# EAGLE board edu (EAGLE 7.6.0)
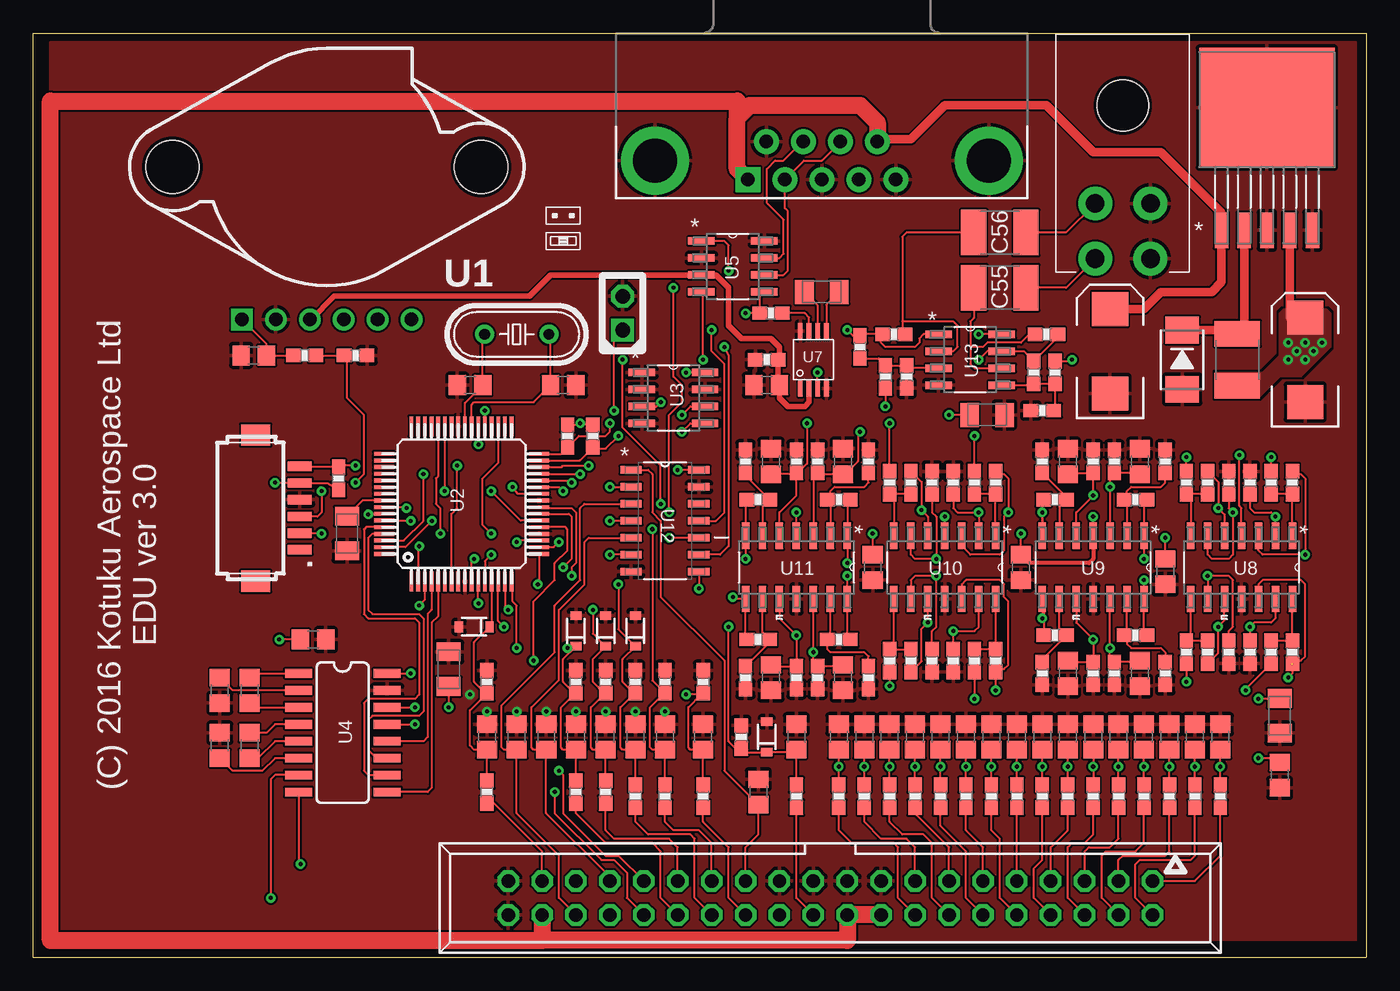
[diagram p0: board, top side]
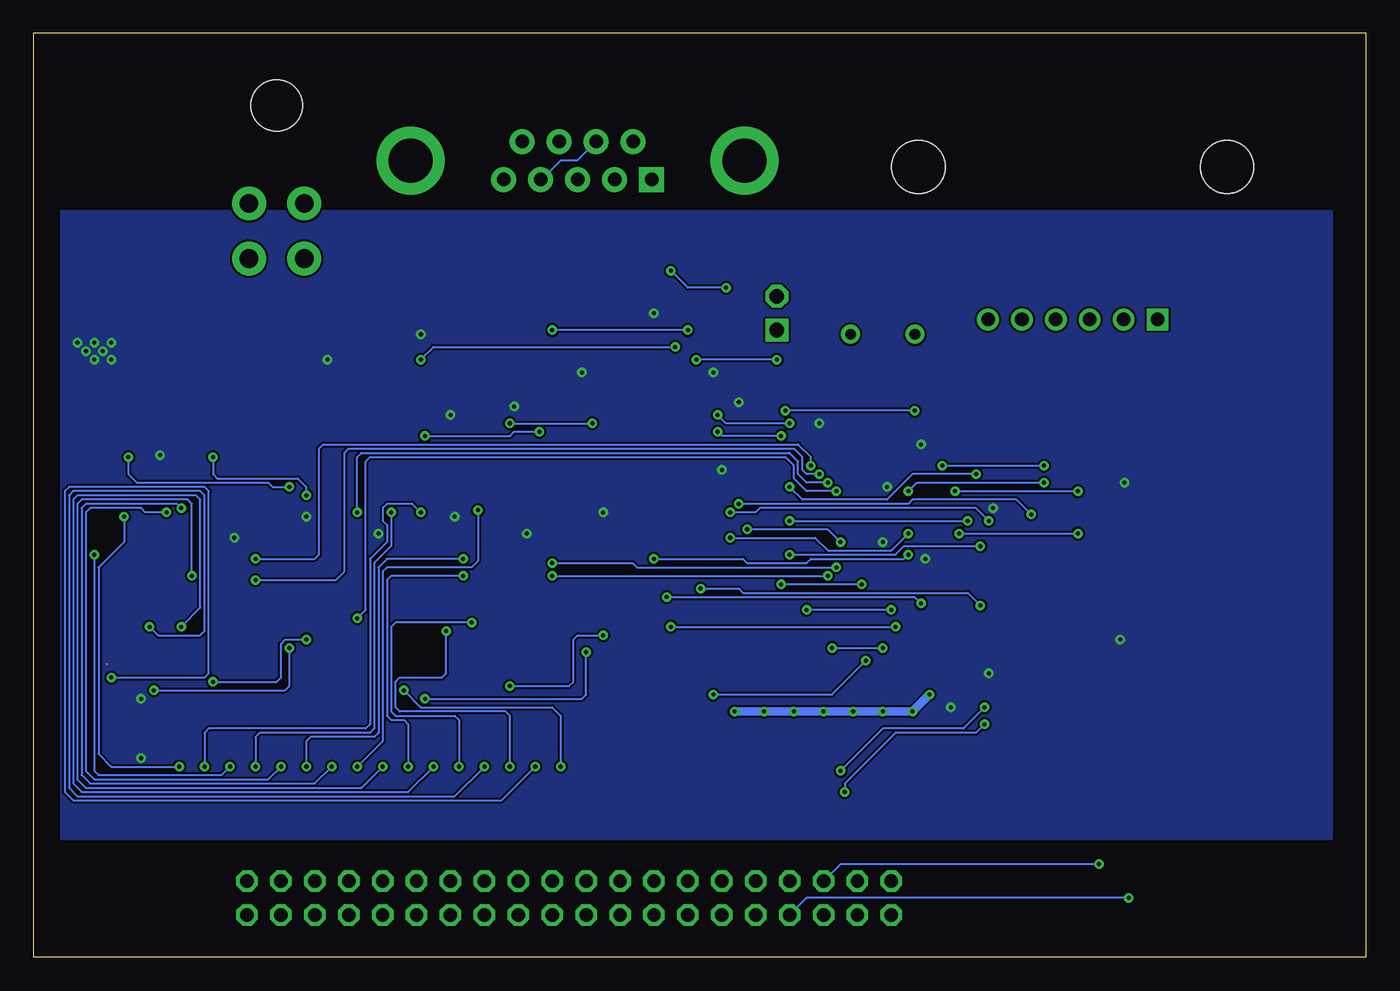
[diagram p1: board, bottom side, seen from below]

Size 99.82 x 69.22 mm. Coordinates in mm from the lower left corner, seen from the top.
Outline: 0,0 0,69.22 99.82,69.22 99.82,0 0,0
Copper layers (1*16): Top 0.035mm / dielectric 1.5mm / Bottom 0.035mm
Design rules "DFRobot_Eagle_Rule_v0.4": minimum track width 6mil, minimum drill 12mil, track to track 6mil, track to pad 6mil, pad to pad 6mil, via to via 6mil, smd to smd 0mil, copper to edge 10mil, drill to drill 10mil, minimum pad ring 12mil, minimum via ring 8mil, stop-mask expansion 2mil, vias tented up to drill 25mil, thermal gap 10mil
Net classes: 0 default: width 0.152 mm, drill 0.305 mm, clearance 0.152 mm; 1 8v: width 0.152 mm, drill 0.305 mm, clearance 0.152 mm; 2 12v: width 0.152 mm, drill 0.305 mm, clearance 0.305 mm

## Footprints (pad centres in the part's own frame; a part is rotated, then mirrored left to right if it is on the bottom)
C805 = smd 1.3 x 1.5: 1 -0.95,0; 2 0.95,0
SMC_A = smd 1.4 x 1.8: + -1.3,0; - 1.3,0
EIA7343 = smd 2.55 x 2.7: A 3.17,0; C -3.17,0
1812 = smd 1.9 x 3.4: 1 -1.95,0; 2 1.95,0
SMA = smd 2 x 2.5: A 2.223,0; C -2.223,0
JUMPER-1X2 = drill 1.092 square: 1 0,2.54 | drill 1.092 octagon: 2 0,0
DB9 = drill 1.016 pad 1.88 square: 1 -5.54,-1.42 | drill 1.016 pad 1.88: 2 -2.77,-1.42; 3 0,-1.42; 4 2.77,-1.42; 5 5.54,-1.42; 6 -4.15,1.42; 7 -1.38,1.42; 8 1.38,1.42; 9 4.15,1.42 | drill 3.302 pad 5.08: G1 -12.5,0; G2 12.5,0
DF13A-6P-1.25H = smd 1.6 x 2.2: M$0 -5.475,2.4; M$1 5.475,2.4 | smd 0.7 x 1.8: P$1 -3.125,-0.9; P$2 -1.875,-0.9; P$3 -0.625,-0.9; P$4 0.625,-0.9; P$5 1.875,-0.9; P$6 3.125,-0.9
1-770968-1 = drill 1.4 pad 2.54: P$1 2.07,11.48; P$2 -2.07,11.48; P$3 2.07,7.34; P$4 -2.07,7.34 | hole 3.86: 0,0
HC49/S = drill 0.813: 1 -2.413,0; 2 2.413,0
0603-RES = smd 1.1 x 1: 1 -0.85,0; 2 0.85,0
FREESCALE_CASE_867B-04 = drill 1.016 square: 1 -12.7,2.54 | drill 1.016: 2 -10.16,2.54; 3 -7.62,2.54; 4 -5.08,2.54; 5 -2.54,2.54; 6 0,2.54 | hole 4: 5.205,13.97; -17.905,13.97
TQFP64-10X10 = smd 1.5 x 0.28: 1 -5.8,3.75; 2 -5.8,3.25; 3 -5.8,2.75; 4 -5.8,2.25; 5 -5.8,1.75; 6 -5.8,1.25; 7 -5.8,0.75; 8 -5.8,0.25; 9 -5.8,-0.25; 10 -5.8,-0.75; 11 -5.8,-1.25; 12 -5.8,-1.75; 13 -5.8,-2.25; 14 -5.8,-2.75; 15 -5.8,-3.25; 16 -5.8,-3.75; 33 5.8,-3.75; 34 5.8,-3.25; 35 5.8,-2.75; 36 5.8,-2.25; 37 5.8,-1.75; 38 5.8,-1.25; 39 5.8,-0.75; 40 5.8,-0.25; 41 5.8,0.25; 42 5.8,0.75; 43 5.8,1.25; 44 5.8,1.75; 45 5.8,2.25; 46 5.8,2.75; 47 5.8,3.25; 48 5.8,3.75 | smd 0.28 x 1.5: 17 -3.75,-5.8; 18 -3.25,-5.8; 19 -2.75,-5.8; 20 -2.25,-5.8; 21 -1.75,-5.8; 22 -1.25,-5.8; 23 -0.75,-5.8; 24 -0.25,-5.8; 25 0.25,-5.8; 26 0.75,-5.8; 27 1.25,-5.8; 28 1.75,-5.8; 29 2.25,-5.8; 30 2.75,-5.8; 31 3.25,-5.8; 32 3.75,-5.8; 49 3.75,5.8; 50 3.25,5.8; 51 2.75,5.8; 52 2.25,5.8; 53 1.75,5.8; 54 1.25,5.8; 55 0.75,5.8; 56 0.25,5.8; 57 -0.25,5.8; 58 -0.75,5.8; 59 -1.25,5.8; 60 -1.75,5.8; 61 -2.25,5.8; 62 -2.75,5.8; 63 -3.25,5.8; 64 -3.75,5.8
SOIC8-N_MC = smd 1.981 x 0.559: 1 -2.362,1.905; 2 -2.362,0.635; 3 -2.362,-0.635; 4 -2.362,-1.905; 5 2.362,-1.905; 6 2.362,-0.635; 7 2.362,0.635; 8 2.362,1.905
SO016 = smd 0.66 x 2.032: 1 -4.445,-3.315; 2 -3.175,-3.315; 3 -1.905,-3.315; 4 -0.635,-3.315; 5 0.635,-3.315; 6 1.905,-3.315; 7 3.175,-3.315; 8 4.445,-3.315; 9 4.445,3.315; 10 3.175,3.315; 11 1.905,3.315; 12 0.635,3.315; 13 -0.635,3.315; 14 -1.905,3.315; 15 -3.175,3.315; 16 -4.445,3.315
SOIC-8N = smd 1.981 x 0.559: 1 1.448,5.715; 2 1.448,4.445; 3 1.448,3.175; 4 1.448,1.905; 5 6.172,1.905; 6 6.172,3.175; 7 6.172,4.445; 8 6.172,5.715
TO170P1435X457-5N = smd 1.016 x 2.692: 1 -3.404,-9.042; 2 -1.702,-9.042; 3 0,-9.042; 4 1.702,-9.042; 5 3.404,-9.042 | smd 10.16 x 8.941: 6 0,0.152
MSOP8 = smd 1.2 x 0.35: 1 -2.145,0.975; 2 -2.145,0.325; 3 -2.145,-0.325; 4 -2.145,-0.975; 5 2.145,-0.975; 6 2.145,-0.325; 7 2.145,0.325; 8 2.145,0.975
SOIC127P600X175-14N = smd 1.981 x 0.559: 1 -2.362,3.81; 2 -2.362,2.54; 3 -2.362,1.27; 4 -2.362,0; 5 -2.362,-1.27; 6 -2.362,-2.54; 7 -2.362,-3.81; 8 2.362,-3.81; 9 2.362,-2.54; 10 2.362,-1.27; 11 2.362,0; 12 2.362,1.27; 13 2.362,2.54; 14 2.362,3.81
SOIC127P600X175-14N' = smd 1.6 x 0.559: 1 -2.54,3.81; 2 -2.54,2.54; 3 -2.54,1.27; 4 -2.54,0; 5 -2.54,-1.27; 6 -2.54,-2.54; 7 -2.54,-3.81; 8 2.54,-3.81; 9 2.54,-2.54; 10 2.54,-1.27; 11 2.54,0; 12 2.54,1.27; 13 2.54,2.54; 14 2.54,3.81
SOIC127P600X175-8N = smd 1.981 x 0.559: 1 -2.362,1.905; 2 -2.362,0.635; 3 -2.362,-0.635; 4 -2.362,-1.905; 5 2.362,-1.905; 6 2.362,-0.635; 7 2.362,0.635; 8 2.362,1.905
057-040-1 = drill 1 octagon: 1 -24.13,-1.27; 2 -24.13,1.27; 3 -21.59,-1.27; 4 -21.59,1.27; 5 -19.05,-1.27; 6 -19.05,1.27; 7 -16.51,-1.27; 8 -16.51,1.27; 9 -13.97,-1.27; 10 -13.97,1.27; 11 -11.43,-1.27; 12 -11.43,1.27; 13 -8.89,-1.27; 14 -8.89,1.27; 15 -6.35,-1.27; 16 -6.35,1.27; 17 -3.81,-1.27; 18 -3.81,1.27; 19 -1.27,-1.27; 20 -1.27,1.27; 21 1.27,-1.27; 22 1.27,1.27; 23 3.81,-1.27; 24 3.81,1.27; 25 6.35,-1.27; 26 6.35,1.27; 27 8.89,-1.27; 28 8.89,1.27; 29 11.43,-1.27; 30 11.43,1.27; 31 13.97,-1.27; 32 13.97,1.27; 33 16.51,-1.27; 34 16.51,1.27; 35 19.05,-1.27; 36 19.05,1.27; 37 21.59,-1.27; 38 21.59,1.27; 39 24.13,-1.27; 40 24.13,1.27
SOD-323 = smd 0.63 x 0.83: 1 -1.15,0; 2 1.15,0

## Placement (x,y rotation side)
C1  100nf  [C805]  85.09,16.51 90 top
C2  100nf  [C805]  88.9,16.51 90 top
C3  100nf  [C805]  77.47,16.51 90 top
C4  100nf  [C805]  81.28,16.51 90 top
C5  100nf  [C805]  69.85,16.51 90 top
C6  1mf  [SMC_A]  59.05,49.85 0 top
C7  100nf  [C805]  73.66,16.51 90 top
C8  100nf  [C805]  62.23,16.51 90 top
C9  100nf  [C805]  66.04,16.51 90 top
C10  100nf  [C805]  82.87,37.15 90 top
C11  100nf  [C805]  16.51,45.09 180 top
C12  100nf  [C805]  54.29,12.38 270 top
C13  100nf  [C805]  36.2,16.51 270 top
C14  100nf  [C805]  47.31,16.51 270 top
C15  100nf  [C805]  77.47,37.15 90 top
C16  100nf  [C805]  82.87,21.27 270 top
C17  100nf  [C805]  77.47,21.27 270 top
C18  100nf  [C805]  33.97,16.51 270 top
C19  100nf  [C805]  40.64,16.51 270 top
C20  100nf  [C805]  42.86,16.51 270 top
C21  100nf  [C805]  57.15,16.51 270 top
C22  100nf  [C805]  45.09,16.51 270 top
C23  100nf  [C805]  38.42,16.51 270 top
C24  10mf  [SMC_A]  23.5,31.75 270 top
C25  22pf  [C805]  39.69,42.86 0 top
C26  22pf  [C805]  32.7,42.86 180 top
C27  100nf  [C805]  83.19,16.51 90 top
C28  100nf  [C805]  87,16.51 90 top
C29  100nf  [C805]  75.56,16.51 90 top
C30  100nf  [C805]  54.93,42.86 180 top
C31  220mf  [EIA7343]  95.25,44.77 90 top
C32  220mf 50v  [EIA7343]  80.64,45.4 90 top
C33  100nf  [C805]  16.19,20 270 top
C34  100nf  [C805]  79.38,16.51 90 top
C35  100nf  [C805]  50.16,16.51 270 top
C36  100nf  [C805]  67.94,16.51 90 top
C37  100nf  [C805]  71.75,16.51 90 top
C38  100nf  [C805]  60.33,16.51 90 top
C39  100nf  [C805]  64.14,16.51 90 top
C40  100nf  [C805]  60.64,37.15 90 top
C41  100nf  [C805]  16.19,15.88 90 top
C42  100nf  [C805]  13.97,20 90 top
C43  100nf  [C805]  13.97,15.88 270 top
C44  100nf  [C805]  55.24,37.15 90 top
C45  100nf  [C805]  60.64,20.95 270 top
C46  100nf  [C805]  55.24,20.95 270 top
C47  100nf  [C805]  62.87,29.21 270 top
C48  100nf  [C805]  20.95,23.81 0 top
C49  100nf  [C805]  93.34,13.65 270 top
C50  100nf  [C805]  73.98,29.21 270 top
C51  100nf  [C805]  84.77,28.89 270 top
C52  10mf  [SMC_A]  93.34,18.1 270 top
C53  10mf  [SMC_A]  31.11,21.59 90 top
C54  10mf  [SMC_A]  71.44,40.64 0 top
C55  100nF  [1812]  72.39,50.16 0 top
C56  100nF  [1812]  72.39,54.29 0 top
D2  B140-13-F  [SMA]  86.04,44.77 270 top
J1  M20-9770246  [JUMPER-1X2]  44.13,49.53 180 top
J2  [DB9]  59.05,59.69 0 top
J3  DF13-6P-1.25H  [DF13A-6P-1.25H]  19.05,33.66 90 top
J4  1-770968-1  [1-770968-1]  81.6,63.82 180 top
L2  33uh  [1812]  90.17,44.77 270 top
Q1  10mHz  [HC49/S]  36.2,46.67 0 top
R1  10K  [0603-RES]  85.09,12.06 270 top
R2  10K  [0603-RES]  88.9,12.06 270 top
R3  10K  [0603-RES]  77.47,12.06 270 top
R4  10K  [0603-RES]  81.28,12.06 270 top
R5  100K  [0603-RES]  89.53,35.56 270 top
R6  100K  [0603-RES]  87.95,35.56 90 top
R7  10K  [0603-RES]  69.85,12.06 270 top
R8  10K  [0603-RES]  73.66,12.06 270 top
R9  100K  [0603-RES]  91.12,35.56 270 top
R10  27K  [0603-RES]  45.09,12.06 90 top
R11  100K  [0603-RES]  94.3,35.56 90 top
R12  27K  [0603-RES]  40.64,12.38 90 top
R13  100K  [0603-RES]  89.53,22.86 90 top
R14  100K  [0603-RES]  87.95,22.86 270 top
R15  10K  [0603-RES]  62.23,12.06 270 top
R16  10K  [0603-RES]  66.04,12.06 270 top
R17  100K  [0603-RES]  91.12,22.86 90 top
R18  10K  [0603-RES]  22.86,35.88 90 top
R19  100K  [0603-RES]  94.3,22.86 270 top
R20  27K  [0603-RES]  33.97,12.38 90 top
R21  1K  [0603-RES]  92.71,35.56 270 top
R22  10K  [0603-RES]  54.93,44.77 0 top
R23  7K15  [0603-RES]  80.96,37.15 270 top
R24  10K  [0603-RES]  55.24,48.26 180 top
R25  1K  [0603-RES]  84.77,37.15 90 top
R26  10K  [0603-RES]  40.64,20.64 90 top
R27  7K15  [0603-RES]  82.55,34.29 180 top
R28  10K  [0603-RES]  45.09,20.64 90 top
R29  2K2  [0603-RES]  41.91,39.05 90 top
R30  2K2  [0603-RES]  40.01,39.05 90 top
R31  10K  [0603-RES]  83.19,12.06 270 top
R32  10K  [0603-RES]  87,12.06 270 top
R33  5K15  [0603-RES]  20.32,45.09 0 top
R34  10K  [0603-RES]  24.13,45.09 180 top
R35  5K15  [0603-RES]  50.16,12.06 90 top
R36  5K15  [0603-RES]  47.31,12.06 90 top
R37  10K  [0603-RES]  50.16,20.64 270 top
R38  10K  [0603-RES]  47.31,20.64 270 top
R39  100K  [0603-RES]  68.9,35.56 270 top
R40  100K  [0603-RES]  72.07,35.56 90 top
R41  1K  [0603-RES]  86.36,35.56 270 top
R42  7K15  [0603-RES]  79.38,37.15 270 top
R43  1K  [0603-RES]  75.56,37.15 90 top
R44  7K15  [0603-RES]  76.52,34.29 0 top
R45  1K  [0603-RES]  92.71,22.86 90 top
R46  7K15  [0603-RES]  80.96,21.27 90 top
R47  1K  [0603-RES]  84.77,21.27 270 top
R48  7K15  [0603-RES]  82.55,24.13 180 top
R49  1K  [0603-RES]  86.36,22.86 90 top
R50  7K15  [0603-RES]  79.38,21.27 90 top
R51  1K  [0603-RES]  75.56,21.27 270 top
R52  7K15  [0603-RES]  76.52,24.13 0 top
R53  10K  [0603-RES]  33.97,20.64 90 top
R54  27K  [0603-RES]  42.86,12.38 90 top
R55  10K  [0603-RES]  42.86,20.64 90 top
R56  27K  [0603-RES]  57.15,12.06 90 top
R57  10K  [0603-RES]  53.02,16.51 90 top
R58  10K  [0603-RES]  75.56,12.06 270 top
R59  10K  [0603-RES]  79.38,12.06 270 top
R60  100K  [0603-RES]  67.31,35.56 270 top
R61  100K  [0603-RES]  65.72,35.56 90 top
R62  10K  [0603-RES]  67.94,12.06 270 top
R63  10K  [0603-RES]  71.75,12.06 270 top
R64  100K  [0603-RES]  67.31,22.23 90 top
R65  100K  [0603-RES]  65.72,22.23 270 top
R66  10K  [0603-RES]  60.33,12.06 270 top
R67  10K  [0603-RES]  64.14,12.06 270 top
R68  100K  [0603-RES]  68.9,22.23 90 top
R69  100K  [0603-RES]  72.07,22.23 270 top
R70  1K  [0603-RES]  70.48,35.56 270 top
R71  7K15  [0603-RES]  58.74,37.15 270 top
R72  1K  [0603-RES]  62.55,37.15 90 top
R73  7K15  [0603-RES]  60.33,34.29 180 top
R74  1K  [0603-RES]  64.14,35.56 270 top
R75  7K15  [0603-RES]  57.15,37.15 270 top
R76  1K  [0603-RES]  53.34,37.15 90 top
R77  7K15  [0603-RES]  54.29,34.29 0 top
R78  1K  [0603-RES]  70.48,22.23 90 top
R79  7K15  [0603-RES]  58.74,20.95 90 top
R80  1K  [0603-RES]  62.55,20.95 270 top
R81  7K15  [0603-RES]  60.33,23.81 180 top
R82  1K  [0603-RES]  64.14,22.23 90 top
R83  7K15  [0603-RES]  57.15,20.95 90 top
R84  1K  [0603-RES]  53.34,20.95 270 top
R85  7K15  [0603-RES]  54.29,23.81 0 top
R86  470K  [0603-RES]  74.93,43.81 90 top
R87  470K  [0603-RES]  76.52,43.81 90 top
R88  470K  [0603-RES]  65.41,43.5 90 top
R89  1M1  [0603-RES]  75.88,46.67 0 top
R90  470K  [0603-RES]  61.91,45.72 90 top
R91  470K  [0603-RES]  75.56,40.96 0 top
R92  470K  [0603-RES]  63.82,43.5 270 top
R93  1M1  [0603-RES]  64.45,46.67 180 top
U1  MPX5100AP  [FREESCALE_CASE_867B-04]  28.32,45.24 0 top
U2  DSPIC33EPXXXGP506  [TQFP64-10X10]  32.07,33.97 90 top
U3  24LC1025-I/SM  [SOIC8-N_MC]  47.94,41.91 0 top
U4  MAX232SOIC16  [SO016]  23.18,16.83 270 top
U5  MCP2562-E/SN  [SOIC-8N]  48.58,47.94 0 top
U6  LM2592HVS-3.3  [TO170P1435X457-5N]  92.39,63.5 0 top
U7  MCP1253  [MSOP8]  58.42,44.77 90 top
U8  MCP619-I/SL  [SOIC127P600X175-14N]  90.49,29.21 270 top
U9  MCP619-I/SL  [SOIC127P600X175-14N]  79.38,29.21 270 top
U10  MCP619-I/SL  [SOIC127P600X175-14N]  68.26,29.21 270 top
U11  MCP619-I/SL  [SOIC127P600X175-14N]  57.15,29.21 270 top
U12  74LCX14M  [SOIC127P600X175-14N']  47.31,32.7 0 top
U13  MCP617-I/SN  [SOIC127P600X175-8N]  70.17,44.77 0 top
U$5  LABEL_JUMPER_1X2  [JUMP2_DESC]  42.23,54.29 0 top
X2  057-040-1  [057-040-1]  59.69,4.45 180 top
Z1  BZT52C3V3S-7-F  [SOD-323]  33.02,24.77 180 top
Z2  BZT52C3V3S-7-F  [SOD-323]  40.64,24.45 90 top
Z3  BZT52C3V3S-7-F  [SOD-323]  42.86,24.45 90 top
Z4  BZT52C3V3S-7-F  [SOD-323]  54.93,16.51 90 top
Z5  BZT52C3V3S-7-F  [SOD-323]  45.09,24.45 90 top

## Library data of the parts
C1-C5 C7-C23 C27-C30 C33-C51 = dp_devices; PARTNO: CL21F104ZBCNNNC
C6 = dp_devices; PARTNO: F931C105MAA
C24 C52-C54 = dp_devices; PARTNO: T491A106K004AT
C25 C26 = dp_devices; PARTNO: C0805C220J5GACTU
C31 C32 = SparkFun; PARTNO: T545X227M016ATE035
C55 C56 = SparkFun; PARTNO: CL21F104ZBCNNNC
D2 = diode2; PARTNO: B140-13-F
J1 = QuantumOptics; PARTNO: M20-9770246
J2 = 15pinD; PARTNO: 1734354-2; PROD_ID: CONN-08194
J3 = con-hirose-df13; PARTNO: DF13A-6P-1.25H(20)
J4 = con-amp; PARTNO: 1-770968-1
L2 = SparkFun; PARTNO: LQH43MN330K03L
Q1 = crystal; OC_FARNELL: 1667008; OC_NEWARK: unknown; PARTNO: ATS100B-E
R1-R4 R7 R8 R15 R16 R18 R22 R24 R26 R28 R31 R32 R34 R37 R38 R53 R55 R57-R59 R62 R63 R66 R67 = SparkFun-Passives; PARTNO: RC0603FR-0710KL
R5 R6 R9 R11 R13 R14 R17 R19 R39 R40 R60 R61 R64 R65 R68 R69 = SparkFun-Passives; PARTNO: RC0603FR-07100KL
R10 R12 R20 R54 R56 = SparkFun-Passives; PARTNO: RC0603FR-0727KL
R21 R25 R41 R43 R45 R47 R49 R51 R70 R72 R74 R76 R78 R80 R82 R84 = SparkFun-Passives; PARTNO: RC0603FR-071KL
R23 R27 R42 R44 R46 R48 R50 R52 R71 R73 R75 R77 R79 R81 R83 R85 = SparkFun-Passives; PARTNO: RC0603FR-077K15L
R29 R30 = SparkFun-Passives; PARTNO: RC0603FR-072K2L
R33 R35 R36 = SparkFun-Passives; PARTNO: RC0603FR-075K23L
R86-R88 R90-R92 = SparkFun-Passives; PARTNO: RC0603FR-07470KL
R89 R93 = SparkFun-Passives; PARTNO: RC0603FR-071M1L
U1 = MPX5100AP; MPN: MPX5100AP; OC_FARNELL: 1457156; OC_NEWARK: 07F9928; PACKAGE: CASE 867B-04; SUPPLIER: FREESCALE SEMICONDUCTOR
U2 = microchip-dspic; PARTNO: DSPIC33EP512GP506-I/PT
U3 = Microchip_By_element14_Batch_1; PARTNO: 24LC1025-I/P
U4 = SparkFun; PARTNO: MAX3232ECDR
U5 = Microchip-MCP2562-E_SN; PARTNO: MCP2562-E/SN
U6 = NSC_By_element14_Batch_1.1; MPN: LM2592HVS-5.0; OC_FARNELL: -; OC_NEWARK: 41K3791; PACKAGE: TO-263-5; PARTNO: LM2592HVSX-3.3/NOPB; SUPPLIER: National Semiconductor
U7 = microchip-dspic; PARTNO: MCP1253-33X50I/MS
U8-U11 = Microchip_By_element14_Batch_1; DESCRIPTION: OP AMP; MPN: MCP619-I/SL; OC_FARNELL: 1439437; OC_NEWARK: 58M8952; PACKAGE: SOIC-14; SUPPLIER: Microchip
U12 = Fairchild_By_element14_Batch_1; MPN: 74LCX14M; OC_FARNELL: 1013778; OC_NEWARK: 78K6290; PACKAGE: SOIC-14; PARTNO: 74LCX14MX; SUPPLIER: Fairchild
U13 = Microchip_By_element14_Batch_1; DESCRIPTION: OP AMP; MPN: MCP617-I/SN; OC_FARNELL: 1439433; OC_NEWARK: 58M8948; PACKAGE: SOIC-8; SUPPLIER: Microchip
U$5 = dp_devices; OFF: Normal; ON: Reset
X2 = con-panduit-changed; MF: SBH11-PBPC-D20-ST-BK; OC_FARNELL: unknown; OC_NEWARK: unknown; PARTNO: SBH11-PBPC-D20-ST-BK
Z1-Z5 = SparkFun; PARTNO: BZT52C3V3S-7-F

## Nets
3.3V: C31.A C47.1 C48.1 C49.1 C50.1 C51.1 C52.+ C53.+ C54.+ J3.P$5 L2.2 R18.1 R24.2 R29.2 R30.2 R87.2 R92.2 U2.10 U2.19 U2.26 U2.38 U2.57 U3.3 U3.8 U4.16 U5.5 U6.4 U7.3 U8.4 U9.4 U10.4 U11.4 U12.14 U13.8
5V: C30.1 R22.2 U1.3 U5.3 U7.2
!MCLR: J3.P$6 R18.2 U2.7
#FUEL_FLOW: U2.62 U12.2
#LEFT_TACH: U2.2 U12.6
#RIGHT_TACH: U2.63 U12.4
+12V: C32.A J2.1 J2.9 U6.1 X2.18 X2.20 X2.38
CANH: J2.4 J2.7 U5.7
CANL: J2.2 J2.8 U5.6
CHT1: R27.1 U2.30 U9.1
CHT1+: R2.2 X2.1
CHT1-: R1.2 X2.3
CHT1OA+: C10.1 R21.1 R23.2 U9.3
CHT1OA-: R25.1 R27.2 U9.2
CHT2: R44.1 U2.28 U9.7
CHT2+: R4.2 X2.5
CHT2-: R3.2 X2.7
CHT2OA+: C15.1 R41.1 R42.2 U9.5
CHT2OA-: R43.1 R44.2 U9.6
CHT3: R52.1 U2.27 U9.8
CHT3+: R8.2 X2.9
CHT3-: R7.2 X2.11
CHT3OA+: C17.1 R49.1 R50.2 U9.10
CHT3OA-: R51.1 R52.2 U9.9
CHT4: R48.1 U2.29 U9.14
CHT4+: R16.2 X2.13
CHT4+OA: C9.1 R16.1 R17.2 U8.13
CHT4-: R15.2 X2.15
CHT4-OA: C8.1 R15.1 R19.2 U8.12
CHT4OA+: C16.1 R45.1 R46.2 U9.12
CHT4OA-: R47.1 R48.2 U9.13
EGT1: R73.1 U2.23 U11.1
EGT1+: R32.2 X2.2
EGT1-: R31.2 X2.4
EGT1OA+: C40.1 R70.1 R71.2 U11.3
EGT1OA-: R72.1 R73.2 U11.2
EGT2: R77.1 U2.12 U11.7
EGT2+: R59.2 X2.6
EGT2-: R58.2 X2.8
EGT2OA+: C44.1 R74.1 R75.2 U11.5
EGT2OA-: R76.1 R77.2 U11.6
EGT3: R85.1 U2.11 U11.8
EGT3+: R63.2 X2.10
EGT3-: R62.2 X2.12
EGT3OA+: C46.1 R82.1 R83.2 U11.10
EGT3OA-: R84.1 R85.2 U11.9
EGT4: R81.1 U2.24 U11.14
EGT4+: R67.2 X2.14
EGT4-: R66.2 X2.16
EGT4OA+: C45.1 R78.1 R79.2 U11.12
EGT4OA-: R80.1 R81.2 U11.13
FUEL_FLOW: C12.2 U12.1 X2.25
FUEL_PRESSURE: R35.1 X2.26
GND: C1.2 C2.2 C3.2 C4.2 C5.2 C7.2 C8.2 C9.2 C10.2 C11.2 C12.1 C13.1 C14.1 C15.2 C16.2 C17.2 C18.1 C19.1 C20.1 C21.1 C22.1 C23.1 C24.- C25.2 C26.2 C27.2 C28.2 C29.2 C30.2 C31.C C32.C C34.2 C35.1 C36.2 C37.2 C38.2 C39.2 C40.2 C42.1 C43.1 C44.2 C45.2 C46.2 C47.2 C48.2 C49.2 C50.2 C51.2 C52.- C53.- C54.- D2.A J1.2 J2.3 J2.5 J2.6 J2.G1 J2.G2 J3.P$4 J4.P$2 J4.P$4 R5.1 R9.1 R13.1 R17.1 R22.1 R23.1 R25.2 R26.2 R28.2 R34.1 R37.1 R38.1 R39.1 R42.1 R43.2 R46.1 R47.2 R50.1 R51.2 R53.2 R55.2 R57.2 R60.1 R64.1 R68.1 R71.1 R72.2 R75.1 R76.2 R79.1 R80.2 R83.1 R84.2 R88.1 R91.1 U1.2 U2.9 U2.20 U2.25 U2.41 U3.1 U3.2 U3.4 U3.7 U4.15 U5.2 U5.8 U6.3 U6.5 U6.6 U7.4 U7.8 U8.11 U9.11 U10.11 U11.11 U12.7 U12.13 U13.4 X2.17 X2.19 X2.21 X2.23 X2.39 X2.40 Z1.2 Z2.2 Z3.2 Z4.2 Z5.2
ISENSE: R56.1 X2.22
LEFT_FUEL: R54.1 X2.29
LEFT_RXD: U4.13 X2.32
LEFT_TACH: C23.2 U12.5 X2.33
LEFT_TXD: U4.14 X2.31
N$1: C1.1 R1.1 R11.2 U8.3
N$2: R24.1 U7.7
N$3: C2.1 R2.1 R9.2 U8.2
N$4: C18.2 R20.2 R53.1 U2.13 Z1.1
N$5: C33.1 U4.1
N$6: C33.2 U4.3
N$7: C41.2 U4.4
N$8: C22.2 R10.2 R28.1 U2.17 Z5.1
N$9: C41.1 U4.5
N$10: C42.2 U4.2
N$11: C43.2 U4.6
N$12: D2.C L2.1 U6.2
N$13: R33.2 R34.2 U2.22
N$14: C35.2 R35.2 R37.2 U2.21
N$15: C14.2 R36.2 R38.2 U2.18
N$16: C25.1 Q1.2 U2.39
N$17: R11.1 R21.2 U8.1
N$18: C3.1 R3.1 R6.2 U8.5
N$19: C4.1 R4.1 R5.2 U8.6
N$20: C7.1 R8.1 R13.2 U8.9
N$21: C55.2 J4.P$1
N$22: C56.2 J4.P$3
N$23: R6.1 R41.2 U8.7
N$24: R14.1 R49.2 U8.8
N$25: C5.1 R7.1 R14.2 U8.10
N$26: R19.1 R45.2 U8.14
N$27: C27.1 R31.1 R40.2 U10.3
N$28: R86.2 R89.2 U12.9 U13.7
N$29: C55.1 R89.1 U13.6
N$30: C56.1 R93.1 U13.2
N$31: C24.+ U2.56
N$32: R90.2 R93.2 U12.11 U13.1
N$33: U2.3 U12.8
N$34: U2.35 U12.10
N$35: J1.1 U2.37
N$37: C6.- U7.5
N$38: C6.+ U7.6
N$39: R30.1 U2.32 U3.6
N$40: R88.2 R90.1 R92.1 U13.3
N$41: R29.1 U2.31 U3.5
N$42: C19.2 R12.2 R26.1 U2.16 Z2.1
N$43: C20.2 R54.2 R55.1 U2.15 Z3.1
N$44: C21.2 R56.2 R57.1 U2.14 Z4.1
N$45: U2.59 U5.1
N$46: U2.61 U4.11
N$47: U2.60 U4.10
N$48: U2.4 U4.12
N$49: U2.5 U4.9
N$50: U2.58 U5.4
N$51: C28.1 R32.1 R39.2 U10.2
N$52: C29.1 R58.1 R61.2 U10.5
N$53: C34.1 R59.1 R60.2 U10.6
N$54: C38.1 R66.1 R69.2 U10.12
N$55: C11.1 R33.1 U1.1
N$56: C36.1 R62.1 R65.2 U10.10
N$57: C37.1 R63.1 R64.2 U10.9
N$58: C39.1 R67.1 R68.2 U10.13
N$59: R40.1 R70.2 U10.1
N$60: R61.1 R74.2 U10.7
N$61: R65.1 R82.2 U10.8
N$62: R86.1 R87.1 R91.2 U13.5
N$70: C26.1 Q1.1 U2.40
N$71: R69.1 R78.2 U10.14
OIL_PRESSURE: R36.1 X2.27
OIL_TEMPERATURE: R10.1 X2.28
PGC: J3.P$2 U2.44
PGD: J3.P$3 U2.43
RIGHT_FUEL: R12.1 X2.30
RIGHT_RXD: U4.8 X2.35
RIGHT_TACH: C13.2 U12.3 X2.36
RIGHT_TXD: U4.7 X2.34
VSENSE: R20.1 X2.37

## Tracks (layer width: path | path; a pad name or v marks a point on that pad's centre or on a via)
3.3V  (via drill 0.3)
  Top 0.152: U4.16 v28.26,21.27 | U2.10 32.82,29.64 v33.02,29.84 | U2.19 36.3,31.22 v36.2,31.11 | U2.26 36.31,34.72 v35.88,35.24 | U2.57 27.87,33.72 v27.94,33.66 | U2.38 33.32,38.44 v33.34,38.42 | R30.2 40.85,39.9 v40.96,40.01 41.06,39.9 R29.2 | U8.4 90.49,33.66 90.33,33.81 v90.33,37.62 | U9.4 v79.38,33.02 | C51.1 v84.77,31.43 | C50.1 v73.98,31.75 | C47.1 v62.87,31.75 | U11.4 v57.15,33.34 | U13.8 v70.8,46.67 | R87.2 77.79,44.66 v77.79,44.77 | R92.2 v63.82,41.27 | C54.+ v68.58,40.64 | U3.8 v48.9,43.81 | U3.3 46.67,41.27 v46.99,41.59 | U12.14 v48.26,36.51 | U5.5 54.4,49.49 R24.2 v53.34,48.26 | U7.3 58.74,42.63 v58.74,43.81 | C52.+ 93.31,19.37 v91.76,19.37 | C49.1 93.03,14.92 v91.76,14.92 | v18.1,35.56 18.13,35.53 J3.P$5 22.04,35.53 R18.1 | C53.+ v31.11,18.73 | C48.1 v18.41,23.81 | U10.4 v68.26,33.02
  Top 0.305: U9.4 79.38,29.84 79.06,29.53 74.61,29.53 C50.1
  Top 0.635: U6.4 94.09,47.94 C31.A
  other vias: 93.98,46.04 95.25,46.04 96.52,46.04 95.89,45.4 94.61,45.4 93.98,44.77 95.25,44.77
  pour Top (no thermals): 93.66,48.58 96.84,48.58 97.16,48.26 97.16,45.72 94.93,43.5 93.34,43.5 91.76,41.91 88.58,41.91 88.58,43.81 92.08,43.81 93.34,45.09 93.34,48.26
  pour Bottom: 2.54,55.88 97.79,55.88 97.79,8.89 2.54,8.89
5V
  Top 0.406: U7.2 58.1,42.62 58.1,41.59 57.78,41.27 56.52,41.27 55.88,41.91 C30.1 55.78,42.96 R22.2 55.88,44.87 55.88,45.72 55.24,46.35 53.02,46.35 52.07,47.31 52.07,50.16 51.12,51.12 U5.3 38.73,51.12 37.15,49.53 22.54,49.53 20.79,47.78 U1.3
!MCLR  (via drill 0.3)
  Top 0.152: J3.P$6 22.81,36.78 R18.2 22.96,36.83 v24.13,36.83 | U2.7 31.32,33.22 31.75,33.66 v31.75,36.83
  Bottom 0.152: v31.75,36.83 v24.13,36.83
#FUEL_FLOW  (via drill 0.3)
  Top 0.152: U2.62 27.73,31.22 29.21,32.7 v29.21,36.2 | v43.18,35.24 U12.2
  Bottom 0.152: v29.21,36.2 33.97,36.2 35.88,34.29 42.23,34.29 v43.18,35.24
#LEFT_TACH  (via drill 0.3)
  Top 0.152: U12.6 v43.18,30.16 | v28.89,30.8 28.82,30.72 U2.2
  Bottom 0.152: v43.18,30.16 35.24,30.16 34.61,30.8 v28.89,30.8
#RIGHT_TACH  (via drill 0.3)
  Top 0.152: U12.4 v43.18,32.7 | v29.84,32.7 27.86,30.72 U2.63
  Bottom 0.152: v43.18,32.7 v29.84,32.7
+12V
  Top 0.635: J2.9 63.37,61.28 65.72,61.28 68.26,63.82 75.88,63.82 79.38,60.33 84.45,60.33 88.99,55.79 U6.1 88.99,50.57 88.27,49.85 84.45,49.85 83.19,48.58 C32.A
  Top 1.27: J2.1 52.7,59.08 52.7,62.87 | 52.7,62.87 53.66,63.82 61.91,63.82 63.2,62.52 J2.9 | X2.38 38.1,1.27 | 52.7,62.87 52.7,64.14 1.27,64.14 1.27,1.27 38.1,1.27 | X2.18 X2.20 60.96,1.27 38.1,1.27
CANH
  Top 0.152: U5.7 55.88,52.39 56.2,52.7 56.2,55.24 54.93,56.52 54.93,59.05 55.56,59.69 56.2,59.69 57.62,61.11 J2.7
  Bottom 0.152: J2.7 59.09,59.69 60.33,59.69 61.74,58.27 J2.4
CANL
  Top 0.152: U5.6 56.2,51.12 56.52,51.44 56.52,55.88 56.28,56.11 J2.2 57.7,59.69 59.05,59.69 60.44,61.07 J2.8
CHT1  (via drill 0.3)
  Top 0.152: R27.1 83.19,34.08 U9.1 v83.19,29.84 | U2.30 39.58,36.72 39.69,36.83 v41.59,36.83
  Bottom 0.152: v83.19,29.84 78.74,29.84 78.42,30.16 78.42,38.1 78.11,38.42 42.55,38.42 41.59,37.47 v41.59,36.83
CHT1+
  Top 0.152: X2.1 87,5.71 88.9,7.62 R2.2
CHT1-
  Top 0.152: X2.3 81.28,7.3 81.6,7.62 84.77,7.62 85.09,7.94 R1.2
CHT1OA+  (via drill 0.3)
  Top 0.152: U9.3 v80.64,35.24 80.64,35.98 R23.2 82.77,36.3 C10.1 | R21.1 v92.71,37.47
  Bottom 0.152: v92.71,37.47 92.71,36.2 92.08,35.56 82.23,35.56 81.92,35.24 v80.64,35.24
CHT1OA-
  Top 0.152: R27.2 81.92,34.08 | 81.92,34.08 U9.2 | 81.92,34.08 81.92,34.92 82.23,35.24 84.45,35.24 84.77,35.56 R25.1
CHT2  (via drill 0.3)
  Top 0.152: R44.1 75.56,34.19 U9.7 v75.56,33.34 | U2.28 40.16,35.72 v40.32,35.56
  Bottom 0.152: v75.56,33.34 75.56,37.47 75.25,37.78 43.18,37.78 42.55,37.15 42.55,36.2 41.91,35.56 v40.32,35.56
CHT2+
  Top 0.152: X2.5 78.74,7.94 79.06,8.26 80.64,8.26 81.28,8.89 R4.2
CHT2-
  Top 0.152: X2.7 76.2,8.26 77.47,9.53 R3.2
CHT2OA+  (via drill 0.3)
  Top 0.152: U9.5 78.11,33.34 v79.38,34.61 R42.2 77.57,36.3 C15.1 | R41.1 v86.36,37.47
  Bottom 0.152: v86.36,37.47 86.36,36.2 86.04,35.88 80.01,35.88 79.38,35.24 v79.38,34.61
CHT2OA-
  Top 0.152: U9.6 76.83,33.76 R44.2 77.37,34.49 R43.1
CHT3  (via drill 0.3)
  Top 0.152: R52.1 75.67,26.75 U9.8 v75.56,25.4 | U2.27 39.39,35.22 v39.69,34.92
  Bottom 0.152: v75.56,25.4 74.93,26.04 74.93,37.15 74.61,37.47 43.5,37.47 42.86,36.83 42.86,35.88 41.91,34.92 v39.69,34.92
CHT3+
  Top 0.152: X2.9 R8.2
CHT3-
  Top 0.152: X2.11 71.12,8.26 69.85,9.53 R7.2
CHT3OA+  (via drill 0.3)
  Top 0.152: U9.10 78.11,25.08 v79.38,23.81 R50.2 77.57,22.12 C17.1 | R49.1 v86.36,20.64
  Bottom 0.152: v86.36,20.64 81.6,20.64 81.28,20.95 81.28,23.5 80.96,23.81 v79.38,23.81
CHT3OA-
  Top 0.152: U9.9 76.83,24.66 R52.2 75.56,22.33 R51.1
CHT4  (via drill 0.3)
  Top 0.152: R48.1 83.19,24.34 U9.14 v83.19,28.26 | U2.29 40.93,36.22 v40.96,36.2
  Bottom 0.152: v83.19,28.26 77.15,28.26 76.52,28.89 76.52,37.78 76.2,38.1 42.86,38.1 42.23,37.47 42.23,36.51 41.91,36.2 v40.96,36.2
CHT4+
  Top 0.152: X2.13 68.58,8.26 66.04,10.79 R16.2
CHT4+OA  (via drill 0.3)
  Top 0.152: R16.1 v66.04,14.29 C9.1 | U8.13 93.03,25.4 92.71,25.08 91.44,25.08 v91.12,24.77 R17.2
  Bottom 0.152: v91.12,24.77 90.49,24.13 87.31,24.13 87,24.45 87,34.61 87.31,34.92 96.84,34.92 97.16,34.61 97.16,12.7 96.52,12.06 68.26,12.06 v66.04,14.29
CHT4-
  Top 0.152: X2.15 66.04,8.26 65.41,8.89 63.5,8.89 62.23,10.16 R15.2
CHT4-OA  (via drill 0.3)  (1 unrouted)
  Top 0.152: 94.3,21.91 94.3,21.27 v93.98,20.95 | R15.1 v62.23,14.29 C8.1 | R19.2 94.51,22.23 94.93,22.23 95.25,22.54 95.25,27.94 94.93,28.26 92.08,28.26 91.76,27.94 U8.12
  Bottom 0.152: v93.98,20.95 87,20.95 86.68,21.27 86.68,34.92 87,35.24 97.16,35.24 97.47,34.92 97.47,12.38 96.84,11.75 64.77,11.75 v62.23,14.29
CHT4OA+  (via drill 0.3)
  Top 0.152: U9.12 v80.64,23.18 80.64,22.44 R46.2 82.77,22.12 C16.1 | R45.1 90.81,20.11 v90.81,20
  Bottom 0.152: v90.81,20 80.96,20 80.64,20.32 v80.64,23.18
CHT4OA-
  Top 0.152: R48.2 81.92,24.34 | 81.92,24.34 U9.13 | 81.92,24.34 81.92,23.5 82.23,23.18 84.45,23.18 84.77,22.86 R47.1
EGT1  (via drill 0.3)
  Top 0.152: R73.1 60.96,34.08 U11.1 v60.96,29.53 | U2.23 40.12,33.22 40.32,33.02 40.32,29.84 v39.69,29.21
  Bottom 0.152: v60.96,29.53 54.93,29.53 54.61,29.21 v39.69,29.21
EGT1+
  Top 0.152: X2.2 82.55,4.45 82.55,6.99 82.87,7.3 86.68,7.3 87,7.62 R32.2
EGT1-
  Top 0.152: X2.4 80.01,4.45 80.01,7.62 80.33,7.94 82.55,7.94 83.19,8.57 R31.2
EGT1OA+  (via drill 0.3)
  Top 0.152: U11.3 58.42,35.98 R71.2 58.84,36.2 C40.1 60.8,36.2 61.75,37.15 61.75,39.21 v61.91,39.37 | R70.1 v70.48,39.05
  Bottom 0.152: v70.48,39.05 64.14,39.05 63.82,39.37 v61.91,39.37
EGT1OA-
  Top 0.152: U11.2 59.69,34.08 R73.2 59.69,34.51 59.69,34.92 60.01,35.24 62.23,35.24 62.55,35.56 R72.1
EGT2  (via drill 0.3)
  Top 0.152: R77.1 53.34,34.19 U11.7 v53.34,29.84 | v34.29,30.16 33.82,29.69 U2.12
  Bottom 0.152: v53.34,29.84 46.67,29.84 46.35,29.53 41.91,29.53 41.59,29.84 34.61,29.84 v34.29,30.16
EGT2+
  Top 0.152: X2.6 77.47,4.45 77.47,8.26 77.79,8.57 78.74,8.57 79.38,9.21 R59.2
EGT2-
  Top 0.152: X2.8 74.93,4.45 74.93,6.67 75.56,7.3 R58.2
EGT2OA+  (via drill 0.3)
  Top 0.152: U11.5 55.88,33.34 57.15,34.61 R75.2 | R75.2 57.05,36.2 C44.1 | R74.1 v64.14,40.01 | v57.94,40.01 57.94,36.99 57.25,36.3 R75.2
  Bottom 0.152: v64.14,40.01 v57.94,40.01
EGT2OA-
  Top 0.152: U11.6 54.61,33.76 R77.2 53.34,36.09 R76.1
EGT3  (via drill 0.3)
  Top 0.152: R85.1 53.34,24.23 U11.8 52.53,26.85 v52.39,26.99 | v33.34,26.51 33.32,26.37 U2.11
  Bottom 0.152: v52.39,26.99 33.81,26.99 v33.34,26.51
EGT3+
  Top 0.152: X2.10 72.39,4.45 72.39,8.89 71.75,9.53 R63.2
EGT3-
  Top 0.152: X2.12 69.85,4.45 69.85,7.94 67.94,9.84 R62.2
EGT3OA+  (via drill 0.3)
  Top 0.152: C46.1 55.34,21.8 R83.2 v57.15,24.13 55.88,25.4 U11.10 | R82.1 v64.14,20.32
  Bottom 0.152: v64.14,20.32 59.69,20.32 59.37,20.64 59.37,23.81 59.05,24.13 v57.15,24.13
EGT3OA-
  Top 0.152: U11.9 54.61,24.34 R85.2 55.14,23.61 R84.1
EGT4  (via drill 0.3)
  Top 0.152: R81.1 60.96,24.03 U11.14 v60.96,28.57 | U2.24 37.94,33.66 40.32,33.66 40.64,33.34 40.64,29.53 40.32,29.21 v40.32,28.57
  Bottom 0.152: v60.96,28.57 v40.32,28.57
EGT4+
  Top 0.152: X2.14 67.31,4.45 67.31,8.57 66.67,9.21 65.09,9.21 64.14,10.16 R67.2
EGT4-
  Top 0.152: X2.16 64.77,4.45 64.77,8.26 64.45,8.57 61.28,8.57 60.33,9.53 R66.2
EGT4OA+  (via drill 0.3)
  Top 0.152: U11.12 v58.42,22.86 58.42,22.12 R79.2 60.54,21.8 C45.1 | R78.1 v70.48,19.37
  Bottom 0.152: v70.48,19.37 58.74,19.37 58.42,19.68 v58.42,22.86
EGT4OA-
  Top 0.152: U11.13 59.69,24.03 R81.2 59.48,23.07 59.69,22.86 62.23,22.86 62.55,22.54 R80.1
FUEL_FLOW
  Top 0.152: X2.25 53.34,8.26 54.29,9.21 C12.2 51.75,13.97 51.75,22.23 46.99,26.99 46.99,32.7 46.35,33.34 46.35,36.2 46.04,36.51 U12.1
FUEL_PRESSURE
  Top 0.152: X2.26 52.07,4.45 52.07,8.26 50.16,10.16 R35.1
GND  (via drill 0.3)
  Bottom 0.635: v32.7,19.68 v33.97,18.41 v36.2,18.41 v38.42,18.41 v40.64,18.41 v42.86,18.41 v45.09,18.41 v47.31,18.41
  pour Top (rank 6): 1.27,68.58 99.06,68.58 99.06,1.27 1.27,1.27
ISENSE
  Top 0.152: X2.22 57.15,4.45 R56.1
LEFT_FUEL
  Top 0.152: X2.29 48.26,8.26 47.62,8.89 43.5,8.89 42.86,9.53 R54.1
LEFT_RXD  (via drill 0.3)
  Top 0.152: U4.13 v28.57,17.46 | v39.05,12.38 39.05,10.79 42.55,7.3 43.5,7.3 44.45,6.35 44.45,4.45 X2.32
  Bottom 0.152: v28.57,17.46 29.21,16.83 35.24,16.83 39.05,13.02 v39.05,12.38
LEFT_TACH
  Top 0.152: X2.33 43.18,6.03 38.42,10.79 C23.2 37.47,15.56 37.31,15.72 37.31,18.73 39.37,20.8 39.37,26.04 41.27,27.94 41.27,31.11 41.59,31.43 U12.5
LEFT_TXD  (via drill 0.3)
  Top 0.152: U4.14 v28.57,18.73 | v39.37,13.97 39.69,13.65 39.69,10.79 42.86,7.62 43.81,7.62 X2.31
  Bottom 0.152: v28.57,18.73 30.16,17.14 36.2,17.14 v39.37,13.97
N$1  (via drill 0.3)
  Top 0.152: R1.1 v85.09,14.29 C1.1 | R11.2 94.51,36.2 94.93,36.2 95.25,35.88 v95.25,30.16 92.08,30.16 91.76,30.48 U8.3
  Bottom 0.152: v95.25,30.16 95.25,13.97 94.93,13.65 85.72,13.65 v85.09,14.29
N$2
  Top 0.152: U7.7 58.1,46.92 58.1,47.94 57.78,48.26 R24.1
N$3  (via drill 0.3)
  Top 0.152: R2.1 v88.9,14.29 C2.1 | R9.2 91.12,33.66 91.44,33.34 92.71,33.34 v93.03,33.02 U8.2
  Bottom 0.152: v93.03,33.02 93.03,31.11 94.93,29.21 94.93,15.24 93.98,14.29 v88.9,14.29
N$4
  Top 0.152: R20.2 C18.2 33.02,15.56 32.7,15.88 32.7,18.52 R53.1 33.87,19.79 33.02,20.64 33.02,23.61 Z1.1 34.32,24.91 U2.13
N$5
  Top 0.152: C33.1 16.51,21.27 U4.1
N$6
  Top 0.152: C33.2 16.51,18.73 U4.3
N$7
  Top 0.152: U4.4 18.1,17.46 17.46,16.82 C41.2
N$8  (via drill 0.3)
  Top 0.152: R10.2 C22.2 44.13,15.56 43.97,15.72 43.97,18.73 45.03,19.79 R28.1 44.98,19.79 44.13,20.64 44.13,22.34 Z5.1 43.81,24.57 v43.81,27.94 | U2.17 37.87,28.34 v37.78,27.94
  Bottom 0.152: v37.78,27.94 v43.81,27.94
N$9
  Top 0.152: U4.5 18.1,16.19 16.83,14.93 C41.1
N$10
  Top 0.152: U4.2 14.92,20 C42.2
N$11
  Top 0.152: U4.6 18.1,14.92 17.14,13.97 14.92,13.97 C43.2
N$12
  Top 0.635: U6.2 90.69,46.72 L2.1 90.17,46.99 D2.C
N$13  (via drill 0.3)
  Top 0.152: R33.2 R34.2 23.5,44.87 23.5,41.91 24.77,40.64 24.77,36.2 v24.13,35.56 | U2.22 36.49,32.72 v34.29,34.92
  Bottom 0.152: v34.29,34.92 33.66,35.56 v24.13,35.56
N$14  (via drill 0.3)
  Top 0.152: R35.2 C35.2 49.21,15.56 49.05,15.72 49.05,18.73 50.01,19.68 | R37.2 50.11,19.79 50.01,19.68 | 50.01,19.68 v48.9,19.68 | v37.47,22.23 37.47,26.67 39.05,28.26 39.05,29.53 40.01,30.48 40.01,32.07 39.85,32.22 U2.21
  Bottom 0.152: v48.9,19.68 40.01,19.68 v37.47,22.23
N$15  (via drill 0.3)
  Top 0.152: R36.2 C14.2 46.35,15.56 46.2,15.72 46.2,18.73 47.25,19.79 R38.2 46.35,20.74 v46.35,32.07 | U2.18 38.98,30.72 v39.37,31.11
  Bottom 0.152: v39.37,31.11 40.32,32.07 v46.35,32.07
N$16
  Top 0.152: U2.39 32.82,41.39 33.02,41.59 37.47,41.59 C25.1 38.74,46.54 Q1.2
N$17
  Top 0.152: U8.1 R11.1 R21.2
N$18  (via drill 0.3)
  Top 0.152: R3.1 v77.47,14.29 C3.1 | R6.2 88.74,35.62 v88.74,33.66 89.22,33.18 U8.5
  Bottom 0.152: v88.74,33.66 89.06,33.97 95.89,33.97 96.2,33.66 96.2,13.65 95.57,13.02 78.74,13.02 v77.47,14.29
N$19  (via drill 0.3)
  Top 0.152: R4.1 v81.28,14.29 C4.1 | R5.2 89.53,33.66 v89.85,33.34 89.85,30.16 89.53,29.84 88.27,29.84 87.95,30.16 U8.6
  Bottom 0.152: v89.85,33.34 91.44,33.34 91.76,33.66 95.57,33.66 95.89,33.34 95.89,13.97 95.25,13.34 82.23,13.34 v81.28,14.29
N$20  (via drill 0.3)
  Top 0.152: R8.1 v73.66,14.29 C7.1 | R13.2 89.53,24.45 89.85,24.77 89.85,28.26 89.53,28.57 v87.95,28.57 U8.9
  Bottom 0.152: v87.95,28.57 87.95,33.97 88.27,34.29 96.2,34.29 96.52,33.97 96.52,13.34 95.89,12.7 75.25,12.7 v73.66,14.29
N$21
  Top 0.152: J4.P$1 77.36,50.16 C55.2
N$22
  Top 0.152: J4.P$3 77.34,54.29 C56.2
N$23
  Top 0.152: R6.1 R41.2 86.68,34.39 U8.7
N$24
  Top 0.152: U8.8 86.68,24.03 R49.2 R14.1
N$25  (via drill 0.3)
  Top 0.152: R7.1 v69.85,14.29 C5.1 | R14.2 88.74,22.8 v88.74,24.77 89.22,25.24 U8.10
  Bottom 0.152: v88.74,24.77 87.31,26.19 87.31,34.29 87.63,34.61 96.52,34.61 96.84,34.29 96.84,13.02 96.2,12.38 71.75,12.38 v69.85,14.29
N$26
  Top 0.152: R45.2 R19.1 U8.14
N$27  (via drill 0.3)
  Top 0.152: R31.1 v83.19,14.29 C27.1 | R40.2 72.29,36.2 72.71,36.2 73.03,35.88 v73.03,33.34 72.71,33.02 72.71,30.48 72.39,30.16 70.17,30.16 69.53,30.8 U10.3
  Bottom 0.152: v73.03,33.34 73.03,30.8 74.3,29.53 74.3,17.14 74.61,16.83 82.87,16.83 83.19,16.51 v83.19,14.29
N$28  (via drill 0.3)
  Top 0.152: R89.2 76.73,46.47 R86.2 74.19,45.4 U13.7 71.44,45.4 v70.8,44.77 | v51.75,45.72 52.07,45.09 52.07,30.8 51.44,30.16 U12.9
  Bottom 0.152: v70.8,44.77 69.85,45.72 v51.75,45.72
N$29
  Top 0.152: C55.1 70.44,47.9 70.17,47.62 70.17,45.72 | 70.17,45.72 70.17,44.45 70.48,44.13 U13.6 | R89.1 74.61,46.67 73.98,46.04 71.44,46.04 71.12,45.72 70.17,45.72
N$30
  Top 0.152: C56.1 65.41,54.29 65.09,53.98 65.09,47.62 | 65.09,47.62 65.09,46.89 R93.1 | U13.2 68.9,45.4 69.22,45.72 69.22,47.31 68.9,47.62 65.09,47.62
N$31
  Top 0.152: U2.56 24.67,34.22 C24.+
N$32  (via drill 0.3)
  Top 0.152: U13.1 66.67,46.67 66.36,46.35 66.36,46.04 66.04,45.72 63.82,45.72 63.5,46.04 63.5,46.57 R93.2 62.02,46.67 R90.2 61.38,46.57 v60.96,46.99 | U12.11 51.12,32.7 51.75,33.34 51.75,44.45 50.8,45.4 v50.8,46.99
  Bottom 0.152: v50.8,46.99 v60.96,46.99
N$33  (via drill 0.3)
  Top 0.152: U12.8 v49.85,27.62 | U2.3 29.32,26.78 v28.89,26.35
  Bottom 0.152: v49.85,27.62 46.99,27.62 46.67,27.3 29.84,27.3 v28.89,26.35
N$34  (via drill 0.3)
  Top 0.152: U12.10 v47.62,31.43 | v34.29,31.75 33.66,32.38 33.66,35.88 34.82,37.04 U2.35
  Bottom 0.152: v47.62,31.43 41.27,31.43 40.32,30.48 35.56,30.48 v34.29,31.75
N$35  (via drill 0.3)
  Top 0.152: U2.37 33.82,41.11 v33.81,40.96 | v43.5,40.96 43.5,46.35 J1.1
  Bottom 0.152: v33.81,40.96 v43.5,40.96
N$37
  Top 0.152: C6.- 59.4,48.89 U7.5
N$38
  Top 0.152: C6.+ 58.74,48.86 U7.6
N$39  (via drill 0.3)
  Top 0.152: U2.32 39.52,37.72 R30.1 40.85,39.05 42.86,39.05 43.18,39.37 v43.18,40.01 | v48.58,40.64 49.21,41.27 U3.6
  Bottom 0.152: v43.18,40.01 47.94,40.01 v48.58,40.64
N$40
  Top 0.152: R90.1 63.3,44.87 R92.1 R88.2 65.62,44.13 U13.3
N$41  (via drill 0.3)
  Top 0.152: U2.31 40.93,37.22 R29.1 42.01,38.1 42.86,38.1 v43.81,39.05 | v48.58,39.37 49.21,40.01 U3.5
  Bottom 0.152: v43.81,39.05 48.26,39.05 v48.58,39.37
N$42  (via drill 0.3)
  Top 0.152: R12.2 C19.2 39.69,15.56 39.53,15.72 39.53,18.73 40.58,19.79 R26.1 40.54,19.79 39.69,20.64 39.69,22.34 Z2.1 40.52,23.18 v40.01,23.18 | v36.2,23.18 36.2,26.35 35.88,26.67 35.88,28.11 U2.16
  Bottom 0.152: v40.01,23.18 v36.2,23.18
N$43  (via drill 0.3)
  Top 0.152: R54.2 C20.2 41.91,15.56 41.75,15.72 41.75,18.73 42.81,19.79 R55.1 42.76,19.79 41.91,20.64 41.91,22.34 Z3.1 41.91,24.25 v41.91,26.04 | U2.15 35.32,26.28 v35.56,26.04
  Bottom 0.152: v35.56,26.04 v41.91,26.04
N$44  (via drill 0.3)
  Top 0.152: R56.2 C21.2 56.95,15.36 Z4.1 53.32,15.36 R57.1 52.6,15.66 52.07,16.19 v52.07,24.77 | v35.24,24.77 34.82,25.19 U2.14
  Bottom 0.152: v52.07,24.77 v35.24,24.77
N$45  (via drill 0.3)
  Top 0.152: U2.59 28.24,32.72 v28.26,32.7 | v47.62,33.34 47.62,40.64 48.58,41.59 48.58,42.86 47.94,43.5 v47.94,50.16 | v52.07,51.44 52.07,53.34 51.75,53.66 U5.1
  Bottom 0.152: v28.26,32.7 29.21,33.66 45.4,33.66 45.72,33.34 v47.62,33.34 | v47.94,50.16 50.8,50.16 v52.07,51.44
N$46
  Top 0.152: U2.61 25.37,31.72 25.08,31.43 25.08,26.04 25.4,25.72 28.89,25.72 29.21,25.4 29.21,18.41 28.89,18.1 25.4,18.1 25.08,17.78 25.08,15.56 25.72,14.92 U4.11
N$47
  Top 0.152: U2.60 24.92,32.22 24.77,32.07 24.77,25.72 25.08,25.4 28.57,25.4 28.89,25.08 28.89,19.68 28.57,19.37 25.08,19.37 24.77,19.05 24.77,13.97 25.08,13.65 U4.10
N$48
  Top 0.152: U2.4 29.82,26.06 29.84,26.04 29.53,25.72 29.53,16.51 29.21,16.19 U4.12
N$49
  Top 0.152: U2.5 30.32,25.55 29.84,25.08 29.84,12.7 29.53,12.38 U4.9
N$50  (via drill 0.3)
  Top 0.152: U2.58 25.2,33.22 v25.08,33.18 | v46.99,33.97 46.99,36.83 44.13,39.69 v44.13,44.77 | v50.16,44.77 50.16,49.71 U5.4
  Bottom 0.152: v25.08,33.18 26.19,34.29 33.97,34.29 34.29,33.97 v46.99,33.97 | v44.13,44.77 v50.16,44.77
N$51  (via drill 0.3)
  Top 0.152: R32.1 v87,14.29 C28.1 | R39.2 68.9,33.66 69.22,33.34 v70.8,33.34 U10.2
  Bottom 0.152: v70.8,33.34 71.44,33.97 73.34,33.97 73.66,33.66 73.66,32.7 73.34,32.38 73.34,31.11 74.61,29.84 74.61,17.46 74.93,17.14 86.68,17.14 87,16.83 v87,14.29
N$52  (via drill 0.3)
  Top 0.152: R58.1 v75.56,14.29 C29.1 | R61.2 66.52,35.62 v66.52,33.5 66.99,33.02 U10.5
  Bottom 0.152: v66.52,33.5 66.52,29.69 66.99,29.21 73.34,29.21 73.66,28.89 73.66,16.19 v75.56,14.29
N$53  (via drill 0.3)
  Top 0.152: C34.1 v79.38,14.29 R59.1 | R60.2 67.31,33.34 67.63,33.02 v67.63,29.84 66.04,29.84 65.72,30.16 U10.6
  Bottom 0.152: v67.63,29.84 73.34,29.84 73.98,29.21 73.98,16.83 74.3,16.51 79.06,16.51 79.38,16.19 v79.38,14.29
N$54  (via drill 0.3)
  Top 0.152: R66.1 v60.33,14.29 C38.1 | U10.12 69.53,27.94 69.85,28.26 72.39,28.26 72.71,27.94 72.71,26.99 73.03,26.67 73.03,21.91 72.71,21.59 72.07,21.59 R69.2 v72.07,20
  Bottom 0.152: v72.07,20 70.8,18.73 60.96,18.73 60.33,18.1 v60.33,14.29
N$55
  Top 0.152: U1.1 17.46,45.94 C11.1 R33.1
N$56  (via drill 0.3)
  Top 0.152: R62.1 v67.94,14.29 C36.1 | R65.2 66.52,22.17 66.52,24.61 v66.99,25.08 U10.10
  Bottom 0.152: v66.99,25.08 72.71,25.08 73.03,24.77 73.03,18.41 72.71,18.1 68.26,18.1 67.94,17.78 v67.94,14.29
N$57  (via drill 0.3)
  Top 0.152: R63.1 v71.75,14.29 C37.1 | R64.2 67.31,24.45 67.63,24.77 v67.63,28.57 66.04,28.57 65.72,28.26 U10.9
  Bottom 0.152: v67.63,28.57 73.03,28.57 73.34,28.26 73.34,18.1 73.03,17.78 72.07,17.78 71.75,17.46 v71.75,14.29
N$58  (via drill 0.3)
  Top 0.152: R67.1 v64.14,14.29 C39.1 | R68.2 v68.9,24.45 70.48,24.45 70.8,24.77 U10.13
  Bottom 0.152: v64.14,14.29 64.14,18.1 64.45,18.41 72.39,18.41 72.71,18.73 72.71,20.64 72.39,20.95 69.22,20.95 68.9,21.27 v68.9,24.45
N$59
  Top 0.152: U10.1 R40.1 R70.2
N$60
  Top 0.152: R61.1 R74.2 64.45,34.39 U10.7
N$61
  Top 0.152: U10.8 64.45,23.39 R82.2 R65.1
N$62
  Top 0.152: U13.5 74.83,42.86 R86.1 R87.1 76.52,41.06 R91.2
N$70
  Top 0.152: U2.40 32.32,41.53 C26.1 33.65,46.54 Q1.1
N$71
  Top 0.152: U10.14 R69.1 R78.2
OIL_PRESSURE
  Top 0.152: X2.27 50.8,8.57 49.85,9.53 47.94,9.53 47.31,10.16 R36.1
OIL_TEMPERATURE
  Top 0.152: X2.28 49.53,4.45 49.53,8.89 49.21,9.21 46.04,9.21 45.09,10.16 R10.1
PGC  (via drill 0.3)
  Top 0.152: U2.44 30.32,36.03 30.16,35.88 30.16,33.97 30.48,33.66 v30.48,31.75 | v21.59,31.75 19.98,31.75 J3.P$2
  Bottom 0.152: v30.48,31.75 v21.59,31.75
PGD  (via drill 0.3)
  Top 0.152: U2.43 30.82,34.95 v30.8,34.92 | v21.59,34.92 21.59,33.34 21.27,33.02 J3.P$3
  Bottom 0.152: v30.8,34.92 v21.59,34.92
RIGHT_FUEL
  Top 0.152: X2.30 46.99,4.45 46.99,7.94 46.35,8.57 42.86,8.57 40.64,10.79 R12.1
RIGHT_RXD  (via drill 0.3)
  Top 0.152: U4.8 19.86,7.12 v20,6.99
  Bottom 0.152: v20,6.99 39.37,6.99 X2.35
RIGHT_TACH
  Top 0.152: X2.36 39.37,4.45 39.37,7.62 36.2,10.79 C13.2 35.24,15.56 35.08,15.72 35.08,18.89 39.05,22.86 39.05,26.35 40.96,28.26 40.96,33.66 41.27,33.97 U12.3
RIGHT_TXD  (via drill 0.3)
  Top 0.152: U4.7 18.1,13.65 17.78,13.34 v17.78,4.45
  Bottom 0.152: v17.78,4.45 41.91,4.45 X2.34
VSENSE
  Top 0.152: X2.37 38.1,7.94 34.51,11.53 R20.1

## Text on the board
tNames: (C) 2016 Kotuku Aerospace Ltd / EDU ver 3.0